# EAGLE board boobalanbrd (EAGLE 9.7.0)

Size 188.23 x 95.11 mm. Coordinates in mm from the lower left corner, seen from the top.
Outline: 0,0 188.23,0 188.23,95.11 0,95.11 0,0
Copper layers (1*16): Top 0.035mm / dielectric 1.5mm / Bottom 0.035mm
Design rules "default": minimum track width 6mil, minimum drill 0.35mm, track to track 6mil, track to pad 6mil, pad to pad 6mil, via to via 6mil, smd to smd 6mil, copper to edge 40mil, drill to drill 6mil, minimum pad ring 10mil, minimum via ring 8mil, stop-mask expansion 4mil, vias tented up to drill 0mil, thermal gap 10mil

## Footprints (pad centres in the part's own frame; a part is rotated, then mirrored left to right if it is on the bottom)
LEDRD254W60D565H860B = drill 0.981 pad 1.581: 1 -1.27,0; 2 1.27,0
7SEG-13 = drill 0.813 long: 1 -5.08,-7.62; 2 -2.54,-7.62; 3 0,-7.62; 4 2.54,-7.62; 5 5.08,-7.62; 6 5.08,7.62; 7 2.54,7.62; 8 0,7.62; 9 -2.54,7.62; 10 -5.08,7.62
BATTERY-GENERIC = drill 1.118 pad 3.15 octagon: + 2.54,0; - -2.54,0
RESAD1016W63L850D250B = drill 0.83 pad 1.43: 1 -5.08,0; 2 5.08,0
GL5528 = drill 0.8 pad 1.4: 1 -1.702,0; 2 1.702,0
DIP762W53P254L1969H508Q14B = drill 0.743 pad 1.343: 1 -3.81,7.62; 2 -3.81,5.08; 3 -3.81,2.54; 4 -3.81,0; 5 -3.81,-2.54; 6 -3.81,-5.08; 7 -3.81,-7.62; 8 3.81,-7.62; 9 3.81,-5.08; 10 3.81,-2.54; 11 3.81,0; 12 3.81,2.54; 13 3.81,5.08; 14 3.81,7.62
DIP762W53P254L1969H508Q16B = drill 0.743 pad 1.343: 1 -3.81,8.89; 2 -3.81,6.35; 3 -3.81,3.81; 4 -3.81,1.27; 5 -3.81,-1.27; 6 -3.81,-3.81; 7 -3.81,-6.35; 8 -3.81,-8.89; 9 3.81,-8.89; 10 3.81,-6.35; 11 3.81,-3.81; 12 3.81,-1.27; 13 3.81,1.27; 14 3.81,3.81; 15 3.81,6.35; 16 3.81,8.89

## Placement (x,y rotation side)
D1  RED  [LEDRD254W60D565H860B]  166.93,83.6 180 top
D2  RED  [LEDRD254W60D565H860B]  172.01,83.6 180 top
D3  RED  [LEDRD254W60D565H860B]  177.09,83.6 180 top
D4  RED  [LEDRD254W60D565H860B]  182.17,83.6 180 top
DIGIT2  7SEG-CK  [7SEG-13]  152.96,70.9 0 top
P1  BATTERYGENERIC  [BATTERY-GENERIC]  8.26,8.26 180 top
R1  1k  [RESAD1016W63L850D250B]  163.12,86.14 90 top
R2  PHOTOCELL_GL5528  [GL5528]  42.47,65.82 0 top
R3  1k  [RESAD1016W63L850D250B]  43.74,50.58 90 top
R4  220  [RESAD1016W63L850D250B]  152.96,86.14 90 top
U1  74HC93_PDIP  [DIP762W53P254L1969H508Q14B]  66.6,69.63 90 top
U2  CD4511_PDIP  [DIP762W53P254L1969H508Q16B]  105.97,69.63 90 top

## Library data of the parts
D1-D4 = Tinkercad; CATEGORY: Opto-Electronic; SUB-CATEGORY: LED; VALUE: LED_RED
DIGIT2 = Tinkercad; CATEGORY: Opto-Electronic; SUB-CATEGORY: Display; TYPE: 7-Segment
P1 R1-R4 U1 U2 = Tinkercad

## Nets
D4_C: D1.2 D2.2 D3.2 D4.2 R1.1
DIGIT2_CK2: DIGIT2.8 R4.1
P1+: P1.+ R2.1 U1.5 U2.3 U2.4 U2.16
P1-: P1.- R1.2 R3.1 R4.2 U1.10 U2.5 U2.8
U1_!CP0: R2.2 R3.2 U1.14
U1_MR2: U1.3 U2.6
U1_Q0: D1.1 U1.1 U1.12
U1_Q1: D2.1 U1.9
U1_Q2: D3.1 U1.8
U1_Q3: D4.1 U1.11
U2_A: DIGIT2.7 U2.13
U2_B: DIGIT2.6 U2.12
U2_C: DIGIT2.4 U2.11
U2_D: DIGIT2.2 U2.10
U2_E: DIGIT2.1 U2.9
U2_F: DIGIT2.9 U2.15
U2_G: DIGIT2.10 U2.14
U2_IB: U1.2 U2.1

## Tracks (layer width: path | path; a pad name or v marks a point on that pad's centre or on a via)
D4_C  (4 unrouted)
DIGIT2_CK2  (1 unrouted)
P1+  (5 unrouted)
P1-  (6 unrouted)
U1_!CP0  (2 unrouted)
U1_MR2  (1 unrouted)
U1_Q0  (2 unrouted)
U1_Q1  (1 unrouted)
U1_Q2  (1 unrouted)
U1_Q3  (1 unrouted)
U2_A  (1 unrouted)
U2_B  (1 unrouted)
U2_C  (1 unrouted)
U2_D  (1 unrouted)
U2_E  (1 unrouted)
U2_F  (1 unrouted)
U2_G  (1 unrouted)
U2_IB  (1 unrouted)